# Altium PCB ad_test_PCB1.PcbDoc
Units mil, origin at the board's own origin, x right, y up, seen from the top; angles counter-clockwise.
Board outline 3700 x 2500 mil, 2 copper layers (Top Layer, Bottom Layer); 20 components, 29 nets, 103 pads, 59 vias.
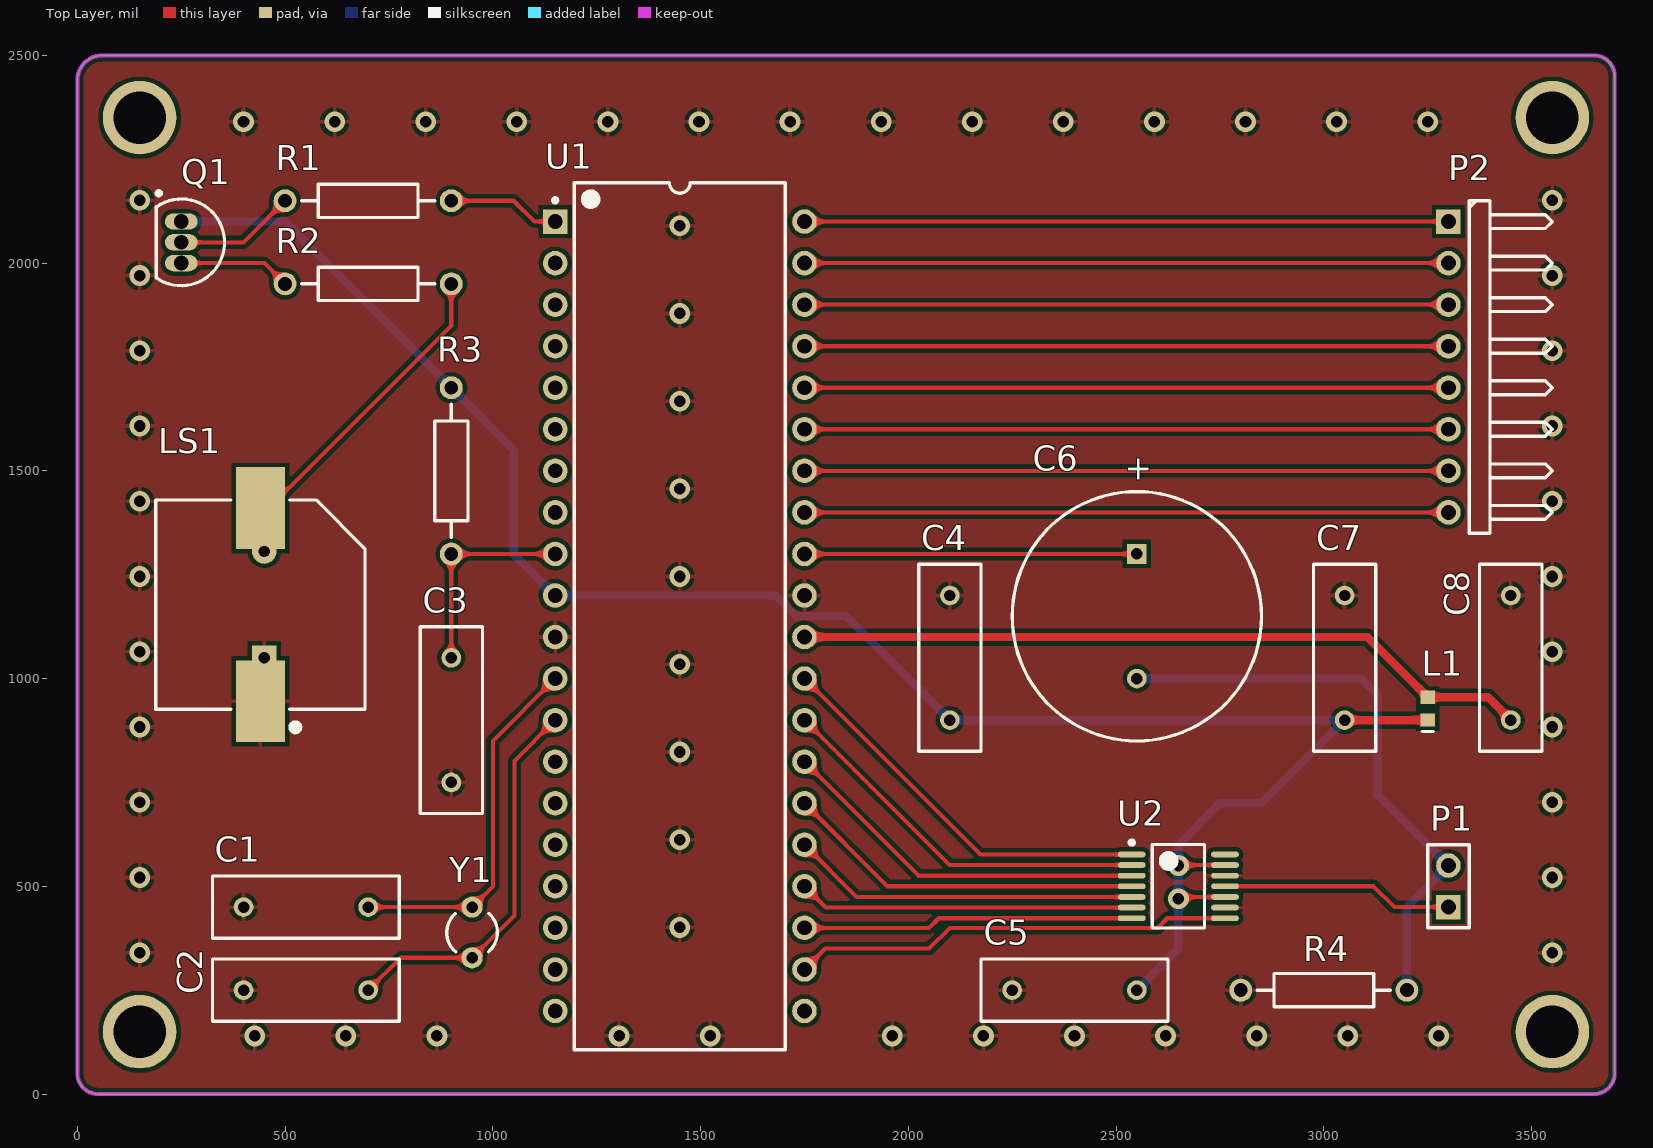
[diagram p0: Top Layer view]
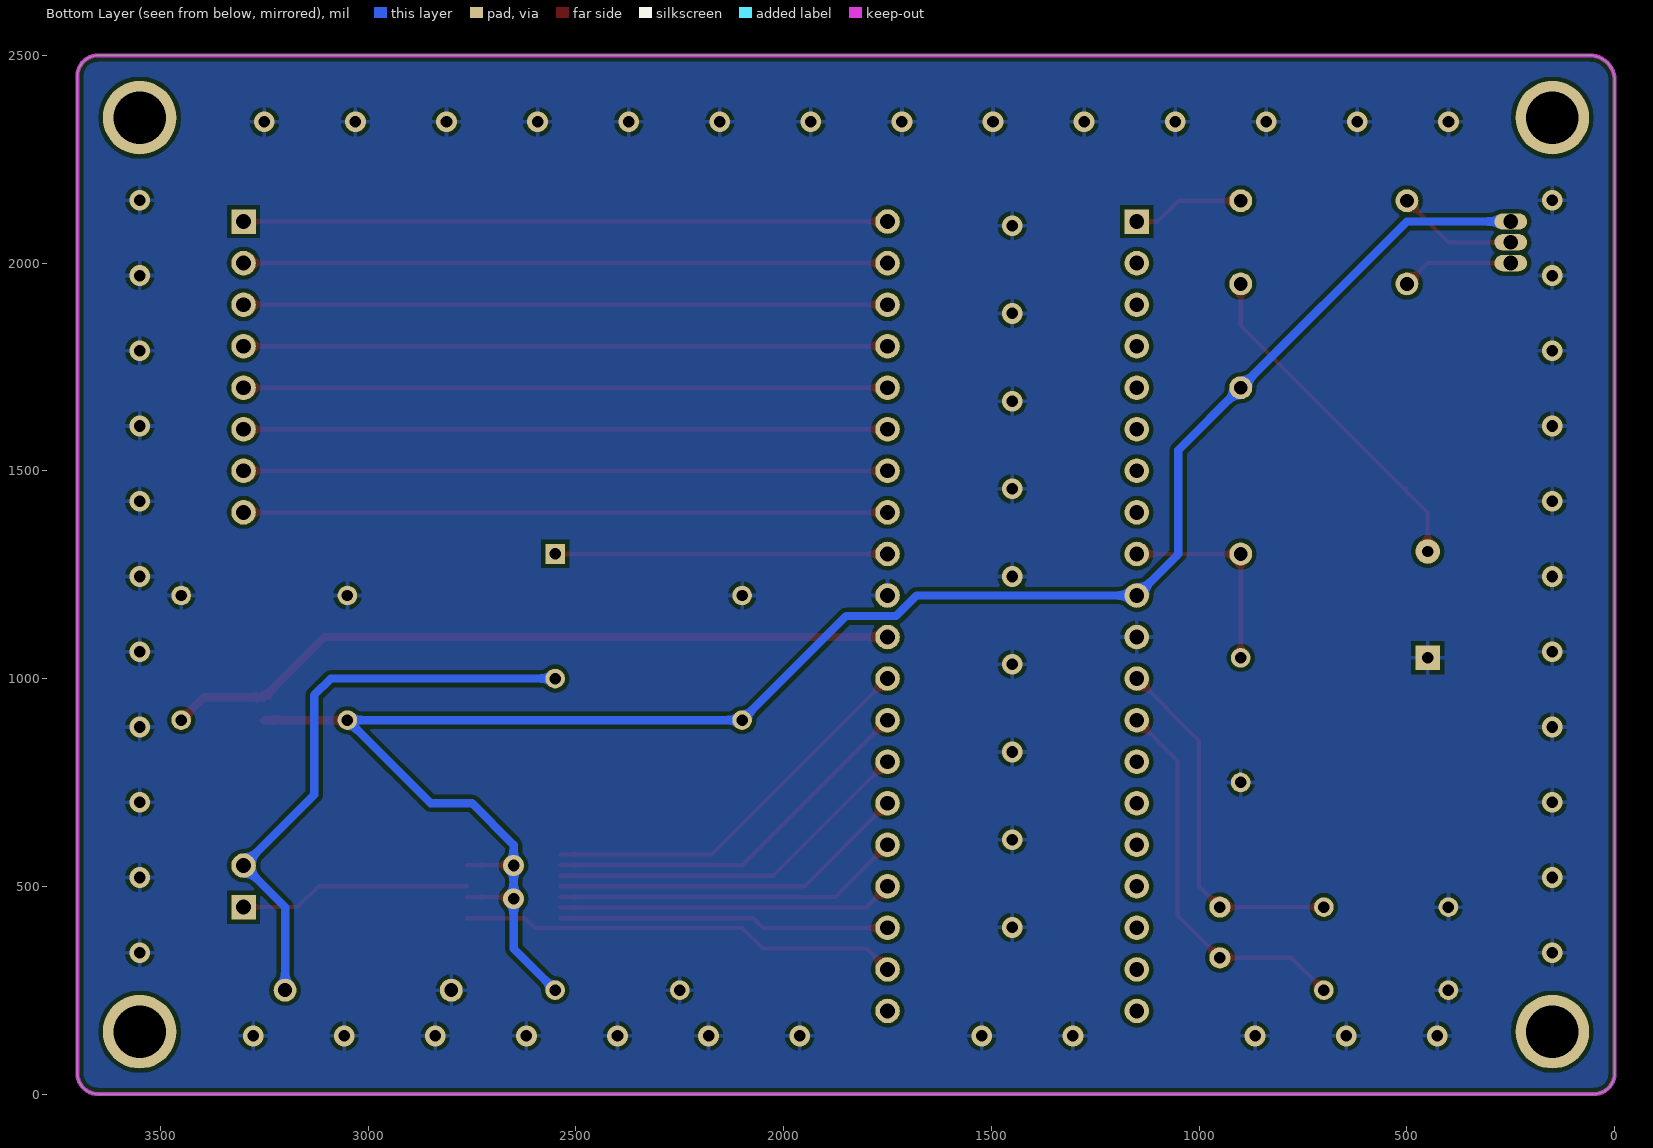
[diagram p1: Bottom Layer view, seen from below]

## Layer stack, top to bottom
Top Solder: solder mask 0.4, Solder Resist, Dk 3.5
Top Layer: signal copper 1.4
Dielectric 1: dielectric 12.6, FR-4, Dk 4.8
Bottom Layer: signal copper 1.4
Bottom Solder: solder mask 0.4, Solder Resist, Dk 3.5

## Board outline
0,50 ccw(c50,50) 50,0 3650,0 ccw(c3650,50) 3700,50 3700,2450 ccw(c3650,2450) 3650,2500 60,2500 ccw(c60,2440) 0,2440
cut-out: 0,2440

## Design rules (kind name [scope] priority, off if disabled: settings)
Clearance [All] p1: gap=10 ignorepadtopadclearanceinfootprint=FALSE except(0: Arc-Hole Track-Hole SMDPad-Hole THPad-Hole Via-Hole Fill-Hole Poly-Hole Region-Hole Text-Hole)
HoleSize [All] p1: absolutevalues=TRUE maxlimit=200 minlimit=1 maxpercent=80.000 minpercent=20.000
HoleToHoleClearance [All] p1: gap=5 allowstackedmicrovias=TRUE
MatchedLengths "Schematic Matched Net Lengths" [InNetClass('DataBus[0..7]')] p1: tolerance=1000 checknetsindiffpair=FALSE checkdiffpairvsdiffpair=TRUE checkxsignals=TRUE checkothers=TRUE
MinimumSolderMaskSliver [All] p1: minsoldermaskwidth=1
PolygonConnect [All] p1: connectstyle=Relief reliefconductorwidth=10 reliefentries=4 polygonreliefangle="90 Angle" airgapwidth=10
RoutingVias [All] p1: holewidth=28 width=50 viastyle="Through Hole" minholewidth=28 minwidth=50 maxholewidth=28 maxwidth=50
SilkToSilkClearance [All] p1: silktosilkclearance=5
SilkToSolderMaskClearance [IsPad] p1: minsilkscreentomaskgap=5 clearancetoexposedcopper=TRUE
SolderMaskExpansion [All] p1: expansion=4
Width [All] p1: maxlimit=50 minlimit=10 preferedwidth=10
25 further rules are at their usual default settings.

## Classes and differential pairs
net class DataBus[0..7]: DataBus0 DataBus1 DataBus2 DataBus3 DataBus4 DataBus5 DataBus6 DataBus7

## Components (designator, comment, footprint, x,y, rotation, side; value= is the part's Value field where it differs from the comment)
C1 "Cap" RAD-0.3 550,450 r0 top value=30pF (schematic designator C3)
C2 "Cap" RAD-0.3 550,250 r180 top value=30pF (schematic designator C8)
C3 "Cap" RAD-0.3 900,900 r90 top value=100pF (schematic designator C1)
C4 "Cap" RAD-0.3 2100,1050 r90 top value=100nF (schematic designator C6)
C5 "Cap" RAD-0.3 2400,250 r180 top value=100nF (schematic designator C2)
C6 "Cap Pol1" RB7.6-15 2550,1150 r90 top value=10uF (schematic designator C7)
C7 "Cap" RAD-0.3 3050,1050 r90 top value=100nF (schematic designator C4)
C8 "Cap" RAD-0.3 3450,1050 r90 top value=100nF (schematic designator C5)
L1 "Inductor" INDC1608L 3250,927.56 r90 top value=10mH
LS1 "Buzzer" ABSM-1574 440.55,945.67 r90 top
P1 "Header 2" HDR1X2 3300,450 r90 top (schematic designator P2)
P2 "ADC_INPUT" HDR1X8H 3300,2100 r270 top (schematic designator P1)
Q1 "NPN" TO-226-AA 250,2050 r180 top
R1 "Res2" AXIAL-0.4 700,2150 r180 top value=1K
R2 "Res2" AXIAL-0.4 700,1950 r180 top value=200
R3 "Res2" AXIAL-0.4 900,1500 r90 top value=10K
R4 "Res2" AXIAL-0.4 3000,250 r0 top value=0K
U1 "ATmega16L-8PI" 40P6 1450,1150 r0 top
U2 "DAC-8" SOT402-1_N 2650,500 r0 top
Y1 "XTAL" R38 950,388.98 r0 top

## Footprints (in the part's own frame and the unit in brackets; to place one, negate y for a bottom-side part, rotate by r counter-clockwise, add the part's x,y. Pads: shape width x height; smd on the part's side, far side on the other; paste and mask are expansions set on the pad)
40P6 [mm] "DIP, 40-Leads, Row Spacing 15.24mm, Pitch 2.54mm, Body 52.2x13.95mm"
  rect 1.5x1.5 hole 0.9: 1(-7.62,24.13)
  round 1.5 hole 0.9: 2(-7.62,21.59) 3(-7.62,19.05) 4(-7.62,16.51) 5(-7.62,13.97) 6(-7.62,11.43) 7(-7.62,8.89) 8(-7.62,6.35) 9(-7.62,3.81) 10(-7.62,1.27) 11(-7.62,-1.27) 12(-7.62,-3.81) 13(-7.62,-6.35) 14(-7.62,-8.89) 15(-7.62,-11.43) 16(-7.62,-13.97) 17(-7.62,-16.51) 18(-7.62,-19.05) 19(-7.62,-21.59) 20(-7.62,-24.13) 21(7.62,-24.13) 22(7.62,-21.59) 23(7.62,-19.05) 24(7.62,-16.51) 25(7.62,-13.97) 26(7.62,-11.43) 27(7.62,-8.89) 28(7.62,-6.35) 29(7.62,-3.81) 30(7.62,-1.27) 31(7.62,1.27) 32(7.62,3.81) 33(7.62,6.35) 34(7.62,8.89) 35(7.62,11.43) 36(7.62,13.97) 37(7.62,16.51) 38(7.62,19.05) 39(7.62,21.59) 40(7.62,24.13)
  silkscreen extent -7.74,-26.5 6.45,26.5, body extent -7.05,-26.47 7.05,26.47, height 4.83
ABSM-1574 [mm] "Magnetic Transducer Buzzer"
  rect 5x3 smd: 1(0,0) 2(11.8,0)
  rect 1.5x1.5 hole 0.7: 1A(2.65,-0.24)
  round 1.5 hole 0.7: 2A(9.15,-0.24)
  silkscreen extent -1.83,-6.4 12.3,6.4
AXIAL-0.4 [mm] "Axial Device, Thru-Hole; 2 Leads; 0.4 in Pin Spacing"
  round 1.4 hole 0.85: 1(-5.08,0) 2(5.08,0)
  silkscreen extent -4.06,-1.02 4.06,1.02
HDR1X2 [mm] "Connector; Header; 2 Position"
  rect 1.5x1.5 hole 0.9: 1(0,0)
  round 1.5 hole 0.9: 2(2.54,0)
  silkscreen extent -1.27,-1.27 3.81,1.27
HDR1X8H [mm] "Connector; Header; 8 Position; Right Angle"
  rect 1.5x1.5 hole 0.9: 1(0,0)
  round 1.5 hole 0.9: 2(2.54,0) 3(5.08,0) 4(7.62,0) 5(10.16,0) 6(12.7,0) 7(15.24,0) 8(17.78,0)
  silkscreen extent -1.27,1.27 19.05,6.35
INDC1608L [mm] "Chip Inductor, Body 1.6x0.8mm, IPC High Density"
  rect 0.8x0.9 smd: 1(-0.7,0) 2(0.7,0)
  silkscreen extent -1.4,-0.35 -1.4,0.35, body extent -0.87,-0.48 0.87,0.48, height 0.55
R38 [mm] "Crystal, Thru-Hole; 2 Leads; Body 3.1 x 8.2 mm (Dia.xH)"
  round 1.3 hole 0.7: 1(0,1.55) 2(0,-1.55)
  silkscreen extent -1.55,-1.19 1.55,1.17
RAD-0.3 [mm] "Radial Cap, Thru-Hole; 2 Leads; 0.3 in Pin Spacing"
  round 1.2 hole 0.7: 1(-3.81,0) 2(3.81,0)
  silkscreen extent -5.71,-1.91 5.71,1.91
RB7.6-15 [mm] "Polarized Capacitor (Radial); 2 Leads"
  rect 1.2x1.2 hole 0.7: 1(3.81,0)
  round 1.2 hole 0.7: 2(-3.81,0)
  silkscreen extent -7.62,-7.62 7.62,7.62
SOT402-1_N [mm] "TSOP, 14-Leads, Body 5x4.4mm, Pitch 0.65mm, IPC Medium Density"
  oval 1.7x0.35 smd: 1(-2.85,1.95) 2(-2.85,1.3) 3(-2.85,0.65) 4(-2.85,0) 5(-2.85,-0.65) 6(-2.85,-1.3) 7(-2.85,-1.95) 8(2.85,-1.95) 9(2.85,-1.3) 10(2.85,-0.65) 11(2.85,0) 12(2.85,0.65) 13(2.85,1.3) 14(2.85,1.95)
  silkscreen extent -2.97,-2.55 1.6,2.8, body extent -2.25,-2.55 2.25,2.55, height 1.1
TO-226-AA [mm] "TO, Flat Index; 3 In-Line, Axial Leads; Body Dia. 4.8mm; Leads 0.55 x 0.51 mm (max)"
  oval 2x1 hole 0.9: 1(0,-1.27) 2(0,0) 3(0,1.27)
  silkscreen extent -2.65,-3.13 1.52,2.65, body extent -2.65,-2.66 1.52,2.66, height 5.33

## Part data
C1 C2 C3 C4 C5 C7 C8: "Capacitor", LatestRevisionDate=17-Jul-2002, LatestRevisionNote="Re-released for DXP Platform.", PackageDescription="Radial Cap, Thru-Hole; 2 Leads; 0.3 in Pin Spacing", PackageReference=RAD-0.3, Published=8-Jun-2000, Publisher="Altium Limited"
C6: "Polarized Capacitor (Radial)", LatestRevisionDate=17-Jul-2002, LatestRevisionNote="Re-released for DXP Platform.", PackageDescription="Polarized Capacitor (Radial); 2 Leads", PackageReference=RB7.6-15, Published=8-Jun-2000, Publisher="Altium Limited"
LS1: "Magnetic Transducer Buzzer", ComponentLink1Description="Manufacturer Link", ComponentLink1URL=http://www.megastar.com/linecard/buzzmode/index.php, DatasheetVersion=17-Dec-2003, LatestRevisionDate=17-Dec-2003, LatestRevisionNote="Schematic revised, PCB Footprint replaced.", PackageDescription="Magnetic Transducer Buzzer", PackageReference=ABSM-1574, Published=24-Mar-1999, Publisher="Altium Limited"
P1: "Header, 2-Pin", LatestRevisionDate=17-Jul-2002, LatestRevisionNote="Re-released for DXP Platform.", Publisher="Altium Limited"
P2: library part "Header 8H", "Header, 8-Pin, Right Angle", LatestRevisionDate=17-Jul-2002, LatestRevisionNote="Re-released for DXP Platform.", Publisher="Altium Limited"
Q1: "NPN Bipolar Transistor", Code_JEDEC=TO-226-AA, LatestRevisionDate=17-Jul-2002, LatestRevisionNote="Re-released for DXP Platform.", PackageDescription="TO, Flat Index; 3 In-Line, Axial Leads; Body Dia. 4.8mm; Leads 0.55 x 0.51 mm (max)", PackageReference=TO-226-AA, Published=8-Jun-2000, Publisher="Altium Limited"
R1 R2 R3 R4: "Resistor", LatestRevisionDate=17-Jul-2002, LatestRevisionNote="Re-released for DXP Platform.", PackageDescription="Axial Device, Thru-Hole; 2 Leads; 0.4 in Pin Spacing", PackageReference=AXIAL-0.4, Published=8-Jun-2000, Publisher="Altium Limited"
U1: "8-Bit AVR Microcontroller with 16K Bytes of In-System Programmable Flash Memory", Supplier Part Number 1=ATMEGA16L-8PI-ND, Code_JEDEC=MS-011-AC, ComponentLink1Description=Datasheet, ComponentLink1URL=http://www.atmel.com/dyn/resources/prod_documents/doc2466.pdf, ComponentLink2Description="Atmel.com Home", ComponentLink2URL=http://www.atmel.com, DatasheetVersion=2466E-AVR-10/02, PackageDescription="40-lead (0.600\"/15.24mm Wide) Plastic Dual Inline Package (PDIP)", PackageReference=40P6, PackageVersion="revB, Sep-2001", Published=17-Sep-2003, Publisher="Altium Limited", Supplier 1=Digi-Key, Supplier 2=Mouser, Supplier Part Number 2=556-ATMEGA16L-8PI
U2: "Generic 8-Bit D/A Converter", Code_JEDEC=MO-153, LatestRevisionDate=29-May-2009, LatestRevisionNote="IPC-7351 Footprint Added.", PackageDescription="14-Pin Thin Small Outline Package 0.65 mm Pitch", PackageReference=SOT402-1, PackageVersion=Mar-2002, Published=8-Jun-2000, Publisher="Altium Limited"
Y1: "Crystal Oscillator", LatestRevisionDate=17-Jul-2002, LatestRevisionNote="Re-released for DXP Platform.", PackageDescription="Crystal, Thru-Hole; 2 Leads; Body 3.1 x 8.2 mm (Dia.xH)", PackageReference=R38, Published=8-Jun-2000, Publisher="Altium Limited"
L1: Code_IEC=1005, Code_JEITA=0402, LatestRevisionDate=29-May-2009, LatestRevisionNote="IPC-7351 Footprint Added.", PackageDescription="Chip Inductor", PackageReference=0402-A, Published=8-Jun-2000, Publisher="Altium Limited"

## Free pads (board coordinates)
  round 177.17 hole 125.98: 0(150,150) 0(150,2350) 0(3550,150) 0(3550,2350)

## Via types
v1: diameter 50, hole 28, Top Layer to Bottom Layer, 59 vias

## Nets (pads, with @x,y where several pads share a name; then routed paths per layer and width w, separated by ;. In a path a pad name is that pad's centre, name@x,y a point inside that pad or via, vN(x,y) a via of type N, cw(c..) or ccw(c..) an arc to the next point about the centre after c; other vN are vias at no path point)
AGND: C6.2 P1.2 R4.2 | length 1418.4
  Bottom Layer w20: C6.2 3090,1000 3130,960 3130,720 P1.2 3200,450 R4.2
AVCC: C8.1 L1.2 U1.30 | length 1782.8
  Top Layer w20: U1.30 3105.12,1100 L1.2 3394.88,955.12 C8.1
DataBus0: U1.22 U2.8 | length 1063.2
  Top Layer w10: U1.22 1800,350 2050,350 2100,400 2600,400 2623.23,423.23 U2.8
DataBus1: U1.23 U2.7 | length 797.4
  Top Layer w10: U1.23 2050,400 2073.23,423.23 U2.7
DataBus2: U1.24 U2.6 | length 809
  Top Layer w10: U1.24 1801.18,448.82 U2.6
DataBus3: U1.25 U2.5 | length 839.8
  Top Layer w10: U1.25 1875.59,474.41 U2.5
DataBus4: U1.26 U2.4 | length 870.6
  Top Layer w10: U1.26 1950,500 U2.4
DataBus5: U1.27 U2.3 | length 901.5
  Top Layer w10: U1.27 2024.41,525.59 U2.3
DataBus6: U1.28 U2.2 | length 932.3
  Top Layer w10: U1.28 2098.82,551.18 U2.2
DataBus7: U1.29 U2.1 | length 963.1
  Top Layer w10: U1.29 2173.23,576.77 U2.1
GND: C1.1 C2.2 C3.1 C4.2 C5.2 C7.2 C8.2 LS1.1 LS1.1A R4.1 U1.11 U1.31 U2.9 U2.12
  other v1: 426.92,140 646.15,140 865.39,140 1303.85,140 1523.08,140 1961.54,140 2180.77,140 2400,140 2619.23,140 2838.46,140 3057.69,140 3276.92,140 150,340 3550,340 1450,401.11 150,521.11 3550,521.11 1450,612.22 150,702.22 3550,702.22 1450,823.33 150,883.33 3550,883.33 1450,1034.44 150,1064.44 3550,1064.44 150,1245.55 1450,1245.56 3550,1245.55 150,1426.67 3550,1426.67 1450,1456.67 150,1607.78 3550,1607.78 1450,1667.78 150,1788.89 3550,1788.89 1450,1878.89 150,1970 3550,1970 1450,2090 150,2151.11 3550,2151.11 400,2340 619.23,2340 838.46,2340 1057.69,2340 1276.92,2340 1496.15,2340 1715.38,2340 1934.61,2340 2153.85,2340 2373.08,2340 2592.31,2340 2811.54,2340 3030.77,2340 3250,2340
NetC3_2: C1.2 U1.12 Y1.1 | length 882.8
  Top Layer w10: C1.2 Y1.1 1000,500 1000,850 U1.12
NetC7_1: C6.1 U1.32 | length 800
  Top Layer w10: U1.32 C6.1
NetC8_1: C2.1 U1.13 Y1.2 | length 937.2
  Top Layer w10: C2.1 777.95,327.95 Y1.2 1052.05,430 1052.05,802.05 U1.13
NetLS1_2: LS1.2 LS1.2A R2.1 | length 830.5
  Top Layer w10: LS1.2A 450,1400 900,1850 R2.1
NetP1_1: P2.1 U1.40 | length 1550
  Top Layer w10: U1.40 P2.1
NetP1_2: P2.2 U1.39 | length 1550
  Top Layer w10: U1.39 P2.2
NetP1_3: P2.3 U1.38 | length 1550
  Top Layer w10: U1.38 P2.3
NetP1_4: P2.4 U1.37 | length 1550
  Top Layer w10: U1.37 P2.4
NetP1_5: P2.5 U1.36 | length 1550
  Top Layer w10: U1.36 P2.5
NetP1_6: P2.6 U1.35 | length 1550
  Top Layer w10: U1.35 P2.6
NetP1_7: P2.7 U1.34 | length 1550
  Top Layer w10: U1.34 P2.7
NetP1_8: P2.8 U1.33 | length 1550
  Top Layer w10: U1.33 P2.8
NetP2_1: P1.1 U2.11 | length 558.5
  Top Layer w10: U2.11 3120,500 3170,450 P1.1
NetQ1_2: Q1.2 R1.2 | length 291.4
  Top Layer w10: Q1.2 400,2050 R1.2
NetQ1_3: Q1.3 R2.2 | length 270.7
  Top Layer w10: Q1.3 450,2000 R2.2
NetR1_1: R1.1 U1.1 | length 270.7
  Top Layer w10: R1.1 1050,2150 1100,2100 U1.1
Reset: C3.2 R3.1 U1.9 | length 500
  Top Layer w10: C3.2 R3.1 U1.9
VCC5: C4.1 C5.1 C7.1 L1.1 Q1.1 R3.2 U1.10 U2.10 U2.13 | length 4785.9
  Top Layer w10: v1(2650,470) 2654.41,474.41 U2.10 ; v1(2650,550) 2651.18,551.18 U2.13
  Top Layer w20: C7.1 L1.1
  Bottom Layer w20: Q1.1 500,2100 R3.2 1050,1550 1050,1300 U1.10 1679.96,1200 1729.49,1150.47 1849.53,1150.47 C4.1 C7.1 2850,700 2750,700 2650,600 v1(2650,550) v1(2650,470) 2650,350 C5.1
pads on no net: U1.2 U1.3 U1.4 U1.5 U1.6 U1.7 U1.8 U1.14 U1.15 U1.16 U1.17 U1.18 U1.19 U1.20 U1.21 U2.14

## Polygon pours and split planes (outlines as drawn)
GND on Top Layer "GND_L01_P000" (solid, remove dead copper, pour order 0): -5.01,50 ccw(c50,50) 50,-5.02 3650,-5.02 ccw(c3650,50) 3705.02,50 3705.02,2450 ccw(c3650,2450) 3663.82,2503.25 ccw(c3660,2500) 3660,2505.02 52.99,2505.02 ccw(c50,2500.99) 50,2506.01 ccw(c50,2450) -6.01,2450 ccw(c-0.99,2450) -5.01,2447.01
GND on Bottom Layer "GND_L02_P001" (solid, remove dead copper, pour order 1): -5.01,50 ccw(c50,50) 50,-5.02 3650,-5.02 ccw(c3650,50) 3705.02,50 3705.02,2450 ccw(c3650,2450) 3663.82,2503.25 ccw(c3660,2500) 3660,2505.02 52.99,2505.02 ccw(c50,2500.99) 50,2506.01 ccw(c50,2450) -6.01,2450 ccw(c-0.99,2450) -5.01,2447.01

## Keep-outs
Keep-Out Layer:
  the board outline again, w10

## Silkscreen, mask and mechanical layers (free items; w line width, h text height)
Drill Drawing:
  lines w10: -1205,-790 -1195,-800

## Text inside footprints (layer, text, board x,y; h text height)
C6: Top Overlay "+" at 2579.01,1470.15 h59.06 r90